# Altium PCB ArduinoFanController.PcbDoc
Units mm, origin at the board's own origin, x right, y up, seen from the top; angles counter-clockwise.
Board outline 113.03 x 52.07 mm, 2 copper layers (Top Layer, Bottom Layer); 33 components, 19 nets, 100 pads, 0 vias.
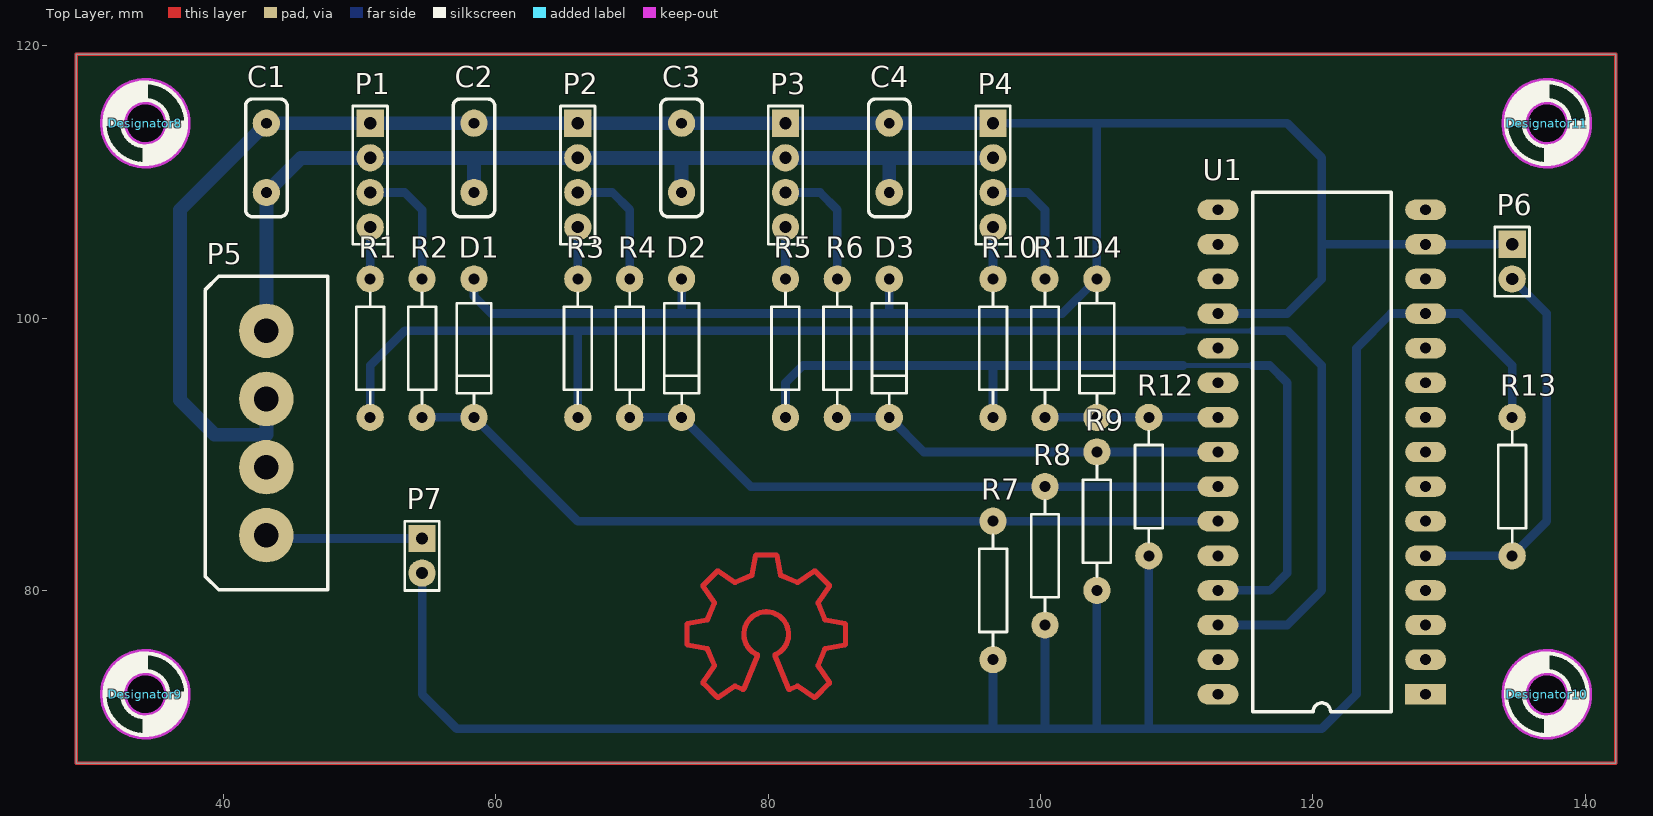
[diagram p0: Top Layer view]
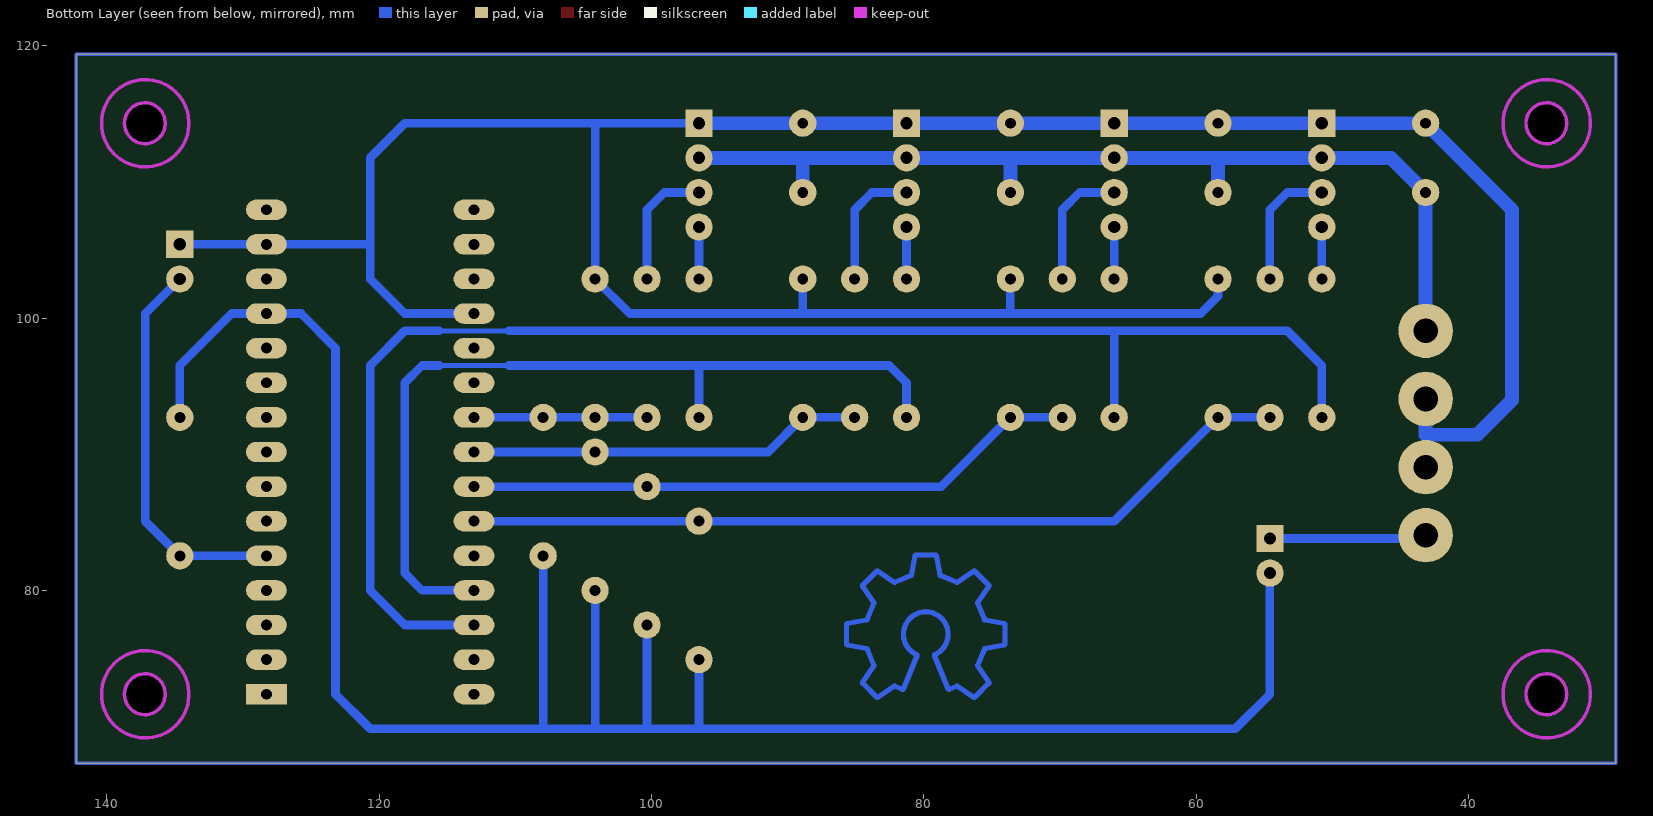
[diagram p1: Bottom Layer view, seen from below]

## Layer stack, top to bottom
Top Solder: solder mask 0.0102, Solder Resist, Dk 3.5
Top Layer: signal copper 0.0356
Dielectric 1: dielectric 0.32, FR-4, Dk 4.8
Bottom Layer: signal copper 0.0356
Bottom Solder: solder mask 0.0102, Solder Resist, Dk 3.5

## Board outline
29.21,67.31 142.24,67.31 142.24,119.38 29.21,119.38

## Design rules (kind name [scope] priority, off if disabled: settings)
Clearance [All] p1: gap=0.254
HoleSize [All] p1: absolutevalues=TRUE maxlimit=3.5 minlimit=0.025 maxpercent=80.000 minpercent=20.000
PolygonConnect [All] p1: connectstyle=Relief reliefconductorwidth=0.254 reliefentries=4 polygonreliefangle="90 Angle" airgapwidth=0.254
RoutingVias [All] p1: holewidth=0.711 width=1.27 viastyle="Through Hole" minholewidth=0.711 minwidth=1.27 maxholewidth=0.711 maxwidth=1.27
SilkToSilkClearance [All] p1 off: silktosilkclearance=0.254
SilkToSolderMaskClearance [IsPad] p1 off: minsilkscreentomaskgap=0.254 clearancetoexposedcopper=TRUE
SolderMaskExpansion [All] p1: expansion=0.102
Width [All] p1: maxlimit=1.27 minlimit=0.381 preferedwidth=0.381 minimp=50.000000 maximp=50.000000 favimp=50.000000
27 further rules are at their usual default settings.

## Classes and differential pairs
component class ArduinoFanController: C1 C2 C3 C4 D1 D2 D3 D4 P1 P2 P3 P4 P5 P6 P7 R1 R2 R3 R4 R5 R6 R7 R8 R9 R10 R11 R12 R13 U1

## Components (designator, comment, footprint, x,y, rotation, side; value= is the part's Value field where it differs from the comment)
C1 "Capacitor" CAP200 43.18,111.76 r90 top
C2 "Capacitor" CAP200 58.42,111.76 r90 top
C3 "Capacitor" CAP200 73.66,111.76 r90 top
C4 "Capacitor" CAP200 88.9,111.76 r90 top
D1 "5V1" DIODE-0.4 58.42,97.79 r270 top
D2 "5V1" DIODE-0.4 73.66,97.79 r270 top
D3 "5V1" DIODE-0.4 88.9,97.79 r270 top
D4 "5V1" DIODE-0.4 104.14,97.79 r270 top
Designator8 "Comment" HOLE-M3 34.29,114.3 r0 top
Designator9 "Comment" HOLE-M3 34.29,72.39 r0 top
Designator10 "Comment" HOLE-M3 137.16,72.39 r0 top
Designator11 "Comment" HOLE-M3 137.16,114.3 r0 top
P1 "FAN-0A" HDR1X4 50.8,114.3 r270 top
P2 "FAN-0A" HDR1X4 66.04,114.3 r270 top
P3 "FAN-0A" HDR1X4 81.28,114.3 r270 top
P4 "FAN-0A" HDR1X4 96.52,114.3 r270 top
P5 "PWR" MOLEX4 43.18,99.06 r0 top
P6 "NTC" HDR1X2 134.62,105.41 r270 top
P7 "Header 2" HDR1X2 54.61,83.82 r270 top
R1 "Res2" AXIAL-0.4 50.8,97.79 r90 top
R2 "Res2" AXIAL-0.4 54.61,97.79 r90 top
R3 "Res2" AXIAL-0.4 66.04,97.79 r90 top
R4 "Res2" AXIAL-0.4 69.85,97.79 r90 top
R5 "Res2" AXIAL-0.4 81.28,97.79 r90 top
R6 "Res2" AXIAL-0.4 85.09,97.79 r90 top
R7 "Res2" AXIAL-0.4 96.52,80.01 r270 top
R8 "Res2" AXIAL-0.4 100.33,82.55 r270 top
R9 "Res2" AXIAL-0.4 104.14,85.09 r270 top
R10 "Res2" AXIAL-0.4 96.52,97.79 r90 top
R11 "Res2" AXIAL-0.4 100.33,97.79 r90 top
R12 "Res2" AXIAL-0.4 107.95,87.63 r270 top
R13 "Res2" AXIAL-0.4 134.62,87.63 r90 top
U1 "NANO" DIP30 128.27,72.39 r180 top

## Footprints (in the part's own frame and the unit in brackets; to place one, negate y for a bottom-side part, rotate by r counter-clockwise, add the part's x,y. Pads: shape width x height; smd on the part's side, far side on the other; paste and mask are expansions set on the pad)
AXIAL-0.4 [mm] "Axial Device, Thru-Hole; 2 Leads; 0.4 in Pin Spacing"
  round 2 hole 0.8: 1(-5.08,0) 2(5.08,0)
  silkscreen extent -4.06,-1.02 4.06,1.02
CAP200 [mm] "Capacitor, 200mil pin spacing"
  round 2 hole 0.8: 1(-2.54,0) 2(2.54,0)
  silkscreen extent -4.32,-1.52 4.32,1.52
DIODE-0.4 [mm] "Diode, Thru-Hole; 2 Leads; 0.4 in Pin Spacing"
  round 2 hole 0.8: 1(-5.08,0) 2(5.08,0)
  silkscreen extent -4.06,-1.27 4.06,1.27
DIP30 [mm]
  rect 3x1.5 hole 0.8: 1(0,0)
  oval 3x1.5 hole 0.8: 2(0,-2.54) 3(0,-5.08) 4(0,-7.62) 5(0,-10.16) 6(0,-12.7) 7(0,-15.24) 8(0,-17.78) 9(0,-20.32) 10(0,-22.86) 11(0,-25.4) 12(0,-27.94) 13(0,-30.48) 14(0,-33.02) 15(0,-35.56) 16(15.24,-35.56) 17(15.24,-33.02) 18(15.24,-30.48) 19(15.24,-27.94) 20(15.24,-25.4) 21(15.24,-22.86) 22(15.24,-20.32) 23(15.24,-17.78) 24(15.24,-15.24) 25(15.24,-12.7) 26(15.24,-10.16) 27(15.24,-7.62) 28(15.24,-5.08) 29(15.24,-2.54) 30(15.24,0)
  silkscreen extent 2.54,-36.83 12.7,1.27
HDR1X2 [mm] "Connector; Header; 2 Position"
  rect 2x2 hole 0.9: 1(0,0)
  round 2 hole 0.9: 2(2.54,0)
  silkscreen extent -1.27,-1.27 3.81,1.27
HDR1X4 [mm] "Connector; Header; 4 Position"
  rect 2x2 hole 0.9: 1(0,0)
  round 2 hole 0.9: 2(2.54,0) 3(5.08,0) 4(7.62,0)
  silkscreen extent -1.27,-1.27 8.89,1.27
HOLE-M3 [mm] "M3 Screw Hole"
  round 3 hole 3.2 unplated: M3(0,0)
  Keep-Out Layer circle w0.254: c0.024,0 r1.5
  Keep-Out Layer circle w0.254: c0,0 r3.206
  silkscreen extent -3,-3 3,3
MOLEX4 [mm] "PC Molex Connector"
  round 4 hole 1.8: 1(0,0) 2(0,-5) 3(0,-10) 4(0,-15)
  silkscreen extent -4.5,-19 4.5,4

## Part data
C1 C2 C3 C4: library part "Cap np"
D1 D2 D3 D4: library part "D Zener", "Zener Diode"
P1 P2 P3 P4: library part "Header 4", "Header, 4-Pin"
P5: library part "Molex 4", "PC Molex connector, 4-Pin"
P6: library part "Header 2", "Header, 2-Pin"
P7: "Header, 2-Pin"
R1 R2 R3 R4 R5 R6 R7 R8 R9 R10 R11 R12 R13: "Resistor"
U1: library part "Arduino Nano", "Arduino Nano"

## Nets (pads, with @x,y where several pads share a name; then routed paths per layer and width w, separated by ;. In a path a pad name is that pad's centre, name@x,y a point inside that pad or via, vN(x,y) a via of type N, cw(c..) or ccw(c..) an arc to the next point about the centre after c; other vN are vias at no path point)
+5V: P7.2 R7.2 R8.2 R9.2 R12.2 R13.2 U1.12 | length 158.4
  Bottom Layer w0.635: P7.2 54.61,72.39 57.15,69.85 100.33,69.85 ; 96.52,69.85 R7.2 ; R8.2 100.33,69.85 ; R9.2 104.14,69.85 ; R12.2 107.95,69.85 ; R13.2 134.62,96.52 130.81,100.33 U1.12 125.73,100.33 123.19,97.79 123.19,72.39 120.65,69.85 107.95,69.85 ; 100.33,69.85 104.14,69.85 ; 104.14,69.85 107.95,69.85
+12V: C1.1 C2.1 C3.1 C4.1 P1.2 P2.2 P3.2 P4.2 P5.1 | length 72.2
  Bottom Layer w1.016: P5.1 C1.1 45.72,111.76 P1.2 58.42,111.76 ; C2.1 58.42,111.76 ; C3.1 73.66,111.76 ; C4.1 88.9,111.76 ; P4.2 88.9,111.76 ; 58.42,111.76 P2.2 73.66,111.76 ; 73.66,111.76 P3.2 88.9,111.76
GND: C1.2 C2.2 C3.2 C4.2 D1.1 D2.1 D3.1 D4.1 P1.1 P2.1 P3.1 P4.1 P5.2 P5.3 P6.1 U1.14 U1.19 | length 208.1
  Bottom Layer w0.635: D1.1 58.42,101.6 59.69,100.33 73.66,100.33 ; D2.1 73.66,100.33 ; D3.1 88.9,100.33 ; P4.1 104.14,114.3 ; U1.19 118.11,100.33 120.65,102.87 120.65,111.76 118.11,114.3 104.14,114.3 ; 120.65,105.41 U1.14 P6.1 ; 73.66,100.33 88.9,100.33 ; 88.9,100.33 101.6,100.33 D4.1 104.14,114.3
  Bottom Layer w1.016: P5.2 43.18,91.44 39.37,91.44 36.83,93.98 36.83,107.95 C1.2 P1.1 C2.2 P2.1 C3.2 P3.1 C4.2 P4.1
NetD1_2: D1.2 R2.1 R7.1 U1.25 | length 61.6
  Bottom Layer w0.635: R2.1 D1.2 66.04,85.09 U1.25
NetD2_2: D2.2 R4.1 R8.1 U1.24 | length 45.3
  Bottom Layer w0.635: R4.1 D2.2 78.74,87.63 U1.24
NetD3_2: D3.2 R6.1 R9.1 U1.23 | length 29
  Bottom Layer w0.635: R6.1 D3.2 91.44,90.17 U1.23
NetD4_2: D4.2 R11.1 R12.1 U1.22 | length 12.7
  Bottom Layer w0.635: R11.1 D4.2 U1.22
NetP1_3: P1.3 R2.2 | length 9.4
  Bottom Layer w0.635: P1.3 53.34,109.22 54.61,107.95 R2.2
NetP1_4: P1.4 R1.2 | length 3.8
  Bottom Layer w0.635: R1.2 P1.4
NetP2_3: P2.3 R4.2 | length 9.4
  Bottom Layer w0.635: P2.3 68.58,109.22 69.85,107.95 R4.2
NetP2_4: P2.4 R3.2 | length 3.8
  Bottom Layer w0.635: R3.2 P2.4
NetP3_3: P3.3 R6.2 | length 9.4
  Bottom Layer w0.635: P3.3 83.82,109.22 85.09,107.95 R6.2
NetP3_4: P3.4 R5.2 | length 3.8
  Bottom Layer w0.635: R5.2 P3.4
NetP4_3: P4.3 R11.2 | length 9.4
  Bottom Layer w0.635: P4.3 99.06,109.22 100.33,107.95 R11.2
NetP4_4: P4.4 R10.2 | length 3.8
  Bottom Layer w0.635: R10.2 P4.4
NetP5_4: P5.4 P7.1 | length 11.5
  Bottom Layer w0.635: P5.4 43.42,83.82 P7.1
NetP6_2: P6.2 R13.1 U1.5 | length 28.8
  Bottom Layer w0.635: U1.5 R13.1 137.16,85.09 137.16,100.33 P6.2
NetR1_1: R1.1 R3.1 U1.28 | length 107.3
  Bottom Layer w0.381: 110.49,99.06 115.57,99.06
  Bottom Layer w0.635: R1.1 50.8,96.52 53.34,99.06 66.04,99.06 ; R3.1 66.04,99.06 ; 110.49,99.06 66.04,99.06 ; U1.28 118.11,77.47 120.65,80.01 120.65,96.52 118.11,99.06 115.57,99.06
NetR5_1: R5.1 R10.1 U1.27 | length 63.8
  Bottom Layer w0.381: 110.49,96.52 115.57,96.52
  Bottom Layer w0.635: R5.1 81.28,95.25 82.55,96.52 96.52,96.52 ; R10.1 96.52,96.52 ; 110.49,96.52 96.52,96.52 ; U1.27 116.84,80.01 118.11,81.28 118.11,95.25 116.84,96.52 115.57,96.52
pads on no net: Designator8.M3 Designator9.M3 Designator10.M3 Designator11.M3 U1.1 U1.2 U1.3 U1.4 U1.6 U1.7 U1.8 U1.9 U1.10 U1.11 U1.13 U1.15 U1.16 U1.17 U1.18 U1.20 U1.21 U1.26 U1.29 U1.30

## Other copper
Multi-Layer:
  lines w0.254: 29.21,67.31 29.21,119.38 142.24,119.38 142.24,67.31 29.21,67.31
  lines w0.381: 74.061,76.086 ccw(c74.136,76.086) 74.122,76.012 75.515,75.744 cw(c75.501,75.67) 75.57,75.699 76.054,74.531 cw(c75.984,74.503) 76.046,74.461 75.251,73.285 ccw(c75.313,73.243) 75.26,73.19 76.264,72.186 ccw(c76.318,72.239) 76.36,72.177 77.535,72.972 cw(c77.577,72.91) 77.606,72.979 78.14,72.758 ccw(c78.169,72.827) 78.238,72.799 79.222,75.209 ccw(c79.153,75.237) 79.184,75.305 cw(c79.87,76.796) 80.557,75.305 ccw(c80.588,75.237) 80.518,75.209 81.502,72.799 ccw(c81.572,72.827) 81.601,72.758 82.135,72.979 cw(c82.164,72.91) 82.206,72.972 83.381,72.177 ccw(c83.423,72.239) 83.476,72.186 84.48,73.19 ccw(c84.427,73.243) 84.489,73.285 83.694,74.461 cw(c83.756,74.503) 83.687,74.531 84.171,75.699 cw(c84.24,75.67) 84.226,75.744 85.619,76.012 ccw(c85.605,76.086) 85.68,76.086 85.68,77.506 ccw(c85.605,77.506) 85.619,77.58 84.226,77.849 cw(c84.24,77.922) 84.171,77.894 83.687,79.061 cw(c83.756,79.09) 83.694,79.132 84.489,80.307 ccw(c84.427,80.349) 84.48,80.402 83.476,81.406 ccw(c83.423,81.353) 83.381,81.415 82.206,80.62 cw(c82.164,80.682) 82.135,80.613 80.968,81.096 cw(c80.997,81.166) 80.923,81.151 80.654,82.545 ccw(c80.58,82.531) 80.58,82.606 79.16,82.606 ccw(c79.16,82.531) 79.087,82.545 78.818,81.151 cw(c78.744,81.166) 78.773,81.096 77.606,80.613 cw(c77.577,80.682) 77.535,80.62 76.36,81.415 ccw(c76.318,81.353) 76.264,81.406 75.26,80.402 ccw(c75.313,80.349) 75.251,80.307 76.046,79.132 cw(c75.984,79.09) 76.054,79.061 75.57,77.894 cw(c75.501,77.922) 75.515,77.849 74.122,77.58 ccw(c74.136,77.506) 74.061,77.506 74.061,76.086